# Altium PCB ESP32C6_Xbee.PcbDoc
Units mm, origin at the board's own origin, x right, y up, seen from the top; angles counter-clockwise.
Board outline 96 x 49 mm, 2 copper layers (Top Layer, Bottom Layer), stack 1.571 mm thick; 24 components, 21 nets, 105 pads, 5 vias.
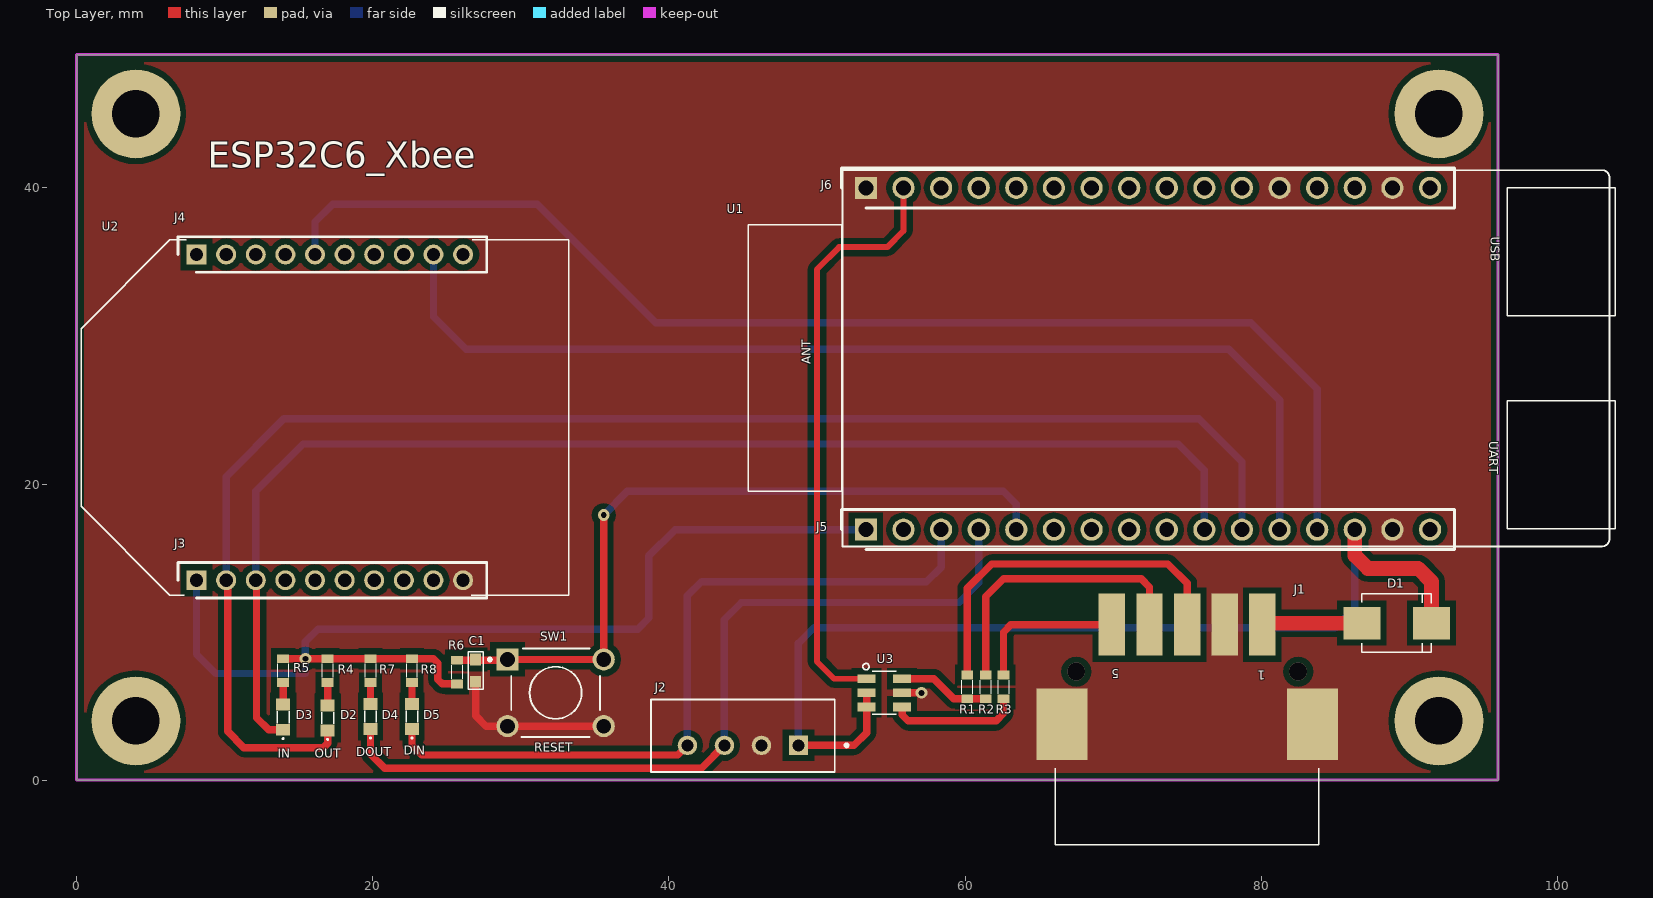
[diagram p0: Top Layer view]
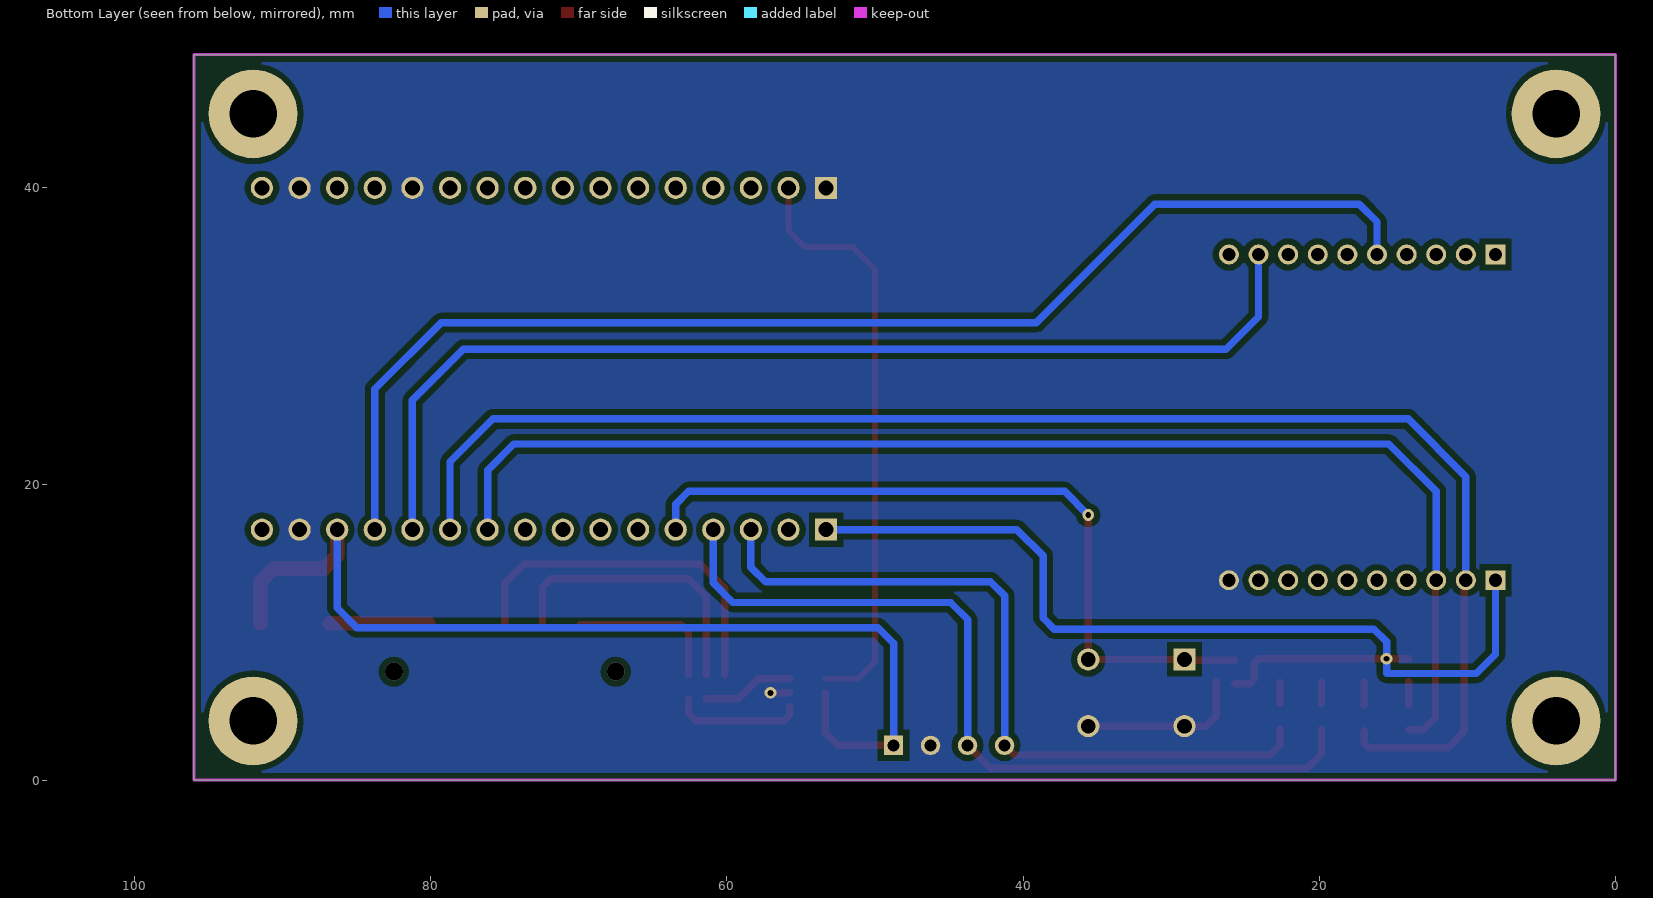
[diagram p1: Bottom Layer view, seen from below]
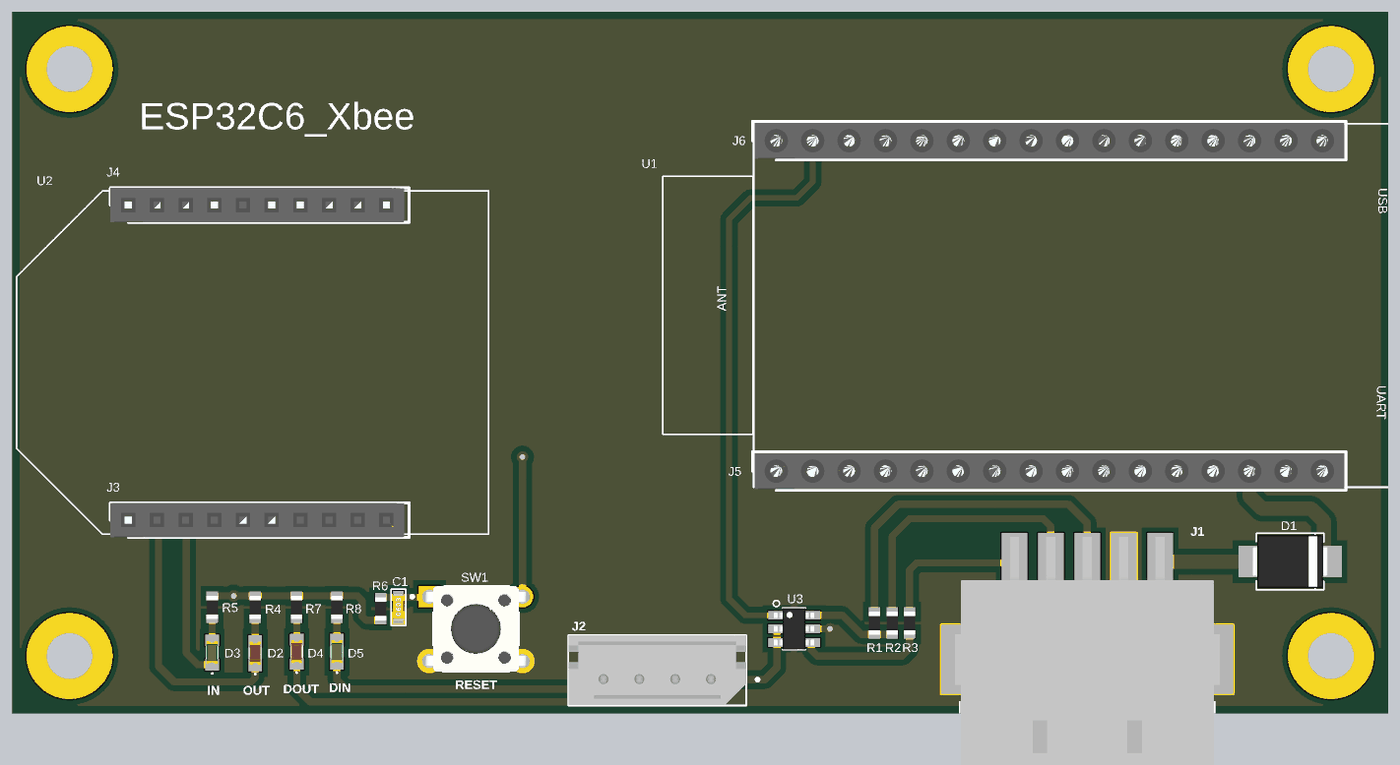
[diagram p2: 3D render of the assembled board from above, using the file's embedded part models]

## Layer stack, top to bottom
Top Solder: solder mask 0.0102, Solder Resist, Dk 3.5
Top Layer: signal copper 0.0356
Dielectric 1: dielectric 1.5, FR-4, Dk 4.8
Bottom Layer: signal copper 0.0356
Bottom Solder: solder mask 0.0102, Solder Resist, Dk 3.5

## Board outline
0,0 0,49 96,49 96,0

## Design rules (kind name [scope] priority, off if disabled: settings)
Clearance Clearance_poly [InPoly] p1: gap=0.4 ignorepadtopadclearanceinfootprint=FALSE
Clearance [All] p2: gap=0.3 ignorepadtopadclearanceinfootprint=FALSE except(0.1: Track-SMDPad)
HoleSize [All] p1: absolutevalues=TRUE maxlimit=5 minlimit=0.025 maxpercent=80.000 minpercent=20.000
MinimumSolderMaskSliver [All] p1: minsoldermaskwidth=0
PolygonConnect PolygonConnect_via [IsVia] p1: connectstyle=Direct reliefconductorwidth=0.254 reliefentries=4 polygonreliefangle="90 Angle" airgapwidth=0.254
PolygonConnect [All] p2: connectstyle=Direct reliefconductorwidth=0.254 reliefentries=4 polygonreliefangle="90 Angle" airgapwidth=0.254
RoomDefinition ESP32C6_Xbee [InComponentClass('ESP32C6_Xbee')] p1: confinementstyle=ConfineOut formatcopy=TRUE lockcomponents=FALSE outline -40.913,-107.011 -19.113,-107.011 -19.113,-96.811 -40.913,-96.811
RoutingVias [All] p1: holewidth=0.3 width=0.6 viastyle="Through Hole" minholewidth=0.3 minwidth=0.6 maxholewidth=0.711 maxwidth=1.27
SilkToSilkClearance [All] p1: silktosilkclearance=0
SilkToSolderMaskClearance [IsPad] p1: minsilkscreentomaskgap=0 clearancetoexposedcopper=TRUE
SolderMaskExpansion [All] p1: expansion=0.102 istentingtop=FALSE
Width [All] p1: maxlimit=2 minlimit=0.254 preferedwidth=0.3 bottomlayer_maxwidth=1 minimp=50.000000 maximp=50.000000 favimp=50.000000
26 further rules are at their usual default settings.

## Components (designator, comment, footprint, x,y, rotation, side; value= is the part's Value field where it differs from the comment)
C1 "100nF" C0603 26.95,7.4 r90 top
D1 "SS24" DO-214AA 86.8,10.6 r0 top
D2 "LSM0603412V" LSM0603412V 16.95,4.2 r90 top
D3 "LSM0603453V" LEDC1608X55N 13.95,4.25 r90 top
D4 "LSM0603412V" LSM0603412V 19.85,4.3 r90 top
D5 "LSM0603453V" LEDC1608X55N 22.65,4.3 r90 top
J1 "5-147323-4" 5-147323-4 75,10.5 r180 top
J2 "22-03-5045" MOLEX_22-03-5045 45,3 r180 top value="4P con"
J3 "M22-7131042" M22-7131042 8.1,13.5 r0 top
J4 "M22-7131042" M22-7131042 8.1,35.5 r0 top
J5 "61301611821" 61301611821 53.304,16.92 r0 top value="1Row 16Pin"
J6 "61301611821" 61301611821 53.304,40 r0 top value="1Row 16Pin"
R1 "100" R0603 60.15,6.3 r270 top
R2 "10" R0603 61.4,6.3 r270 top
R3 "10" R0603 62.6,6.3 r270 top
R4 "1K" R0603 16.95,7.4 r90 top
R5 "1K" R0603 13.95,7.4 r90 top
R6 "10K" R0603 25.7,7.3 r270 top
R7 "1K" R0603 19.85,7.4 r90 top
R8 "1K" R0603 22.65,7.4 r90 top
SW1 "1825910-6" SW_1825910-6-4 32.35,5.9 r0 top
U1 "ESP32C6-Devkit" ESP32-C6-DEVKIT 73.3,28.6 r90 top value="No FIT"
U2 "XBee-PRO S3B" XBEE(MMS-110-02-L-SV-K-TR) 17,24.5 r90 top value="No FIT"
U3 "ISL3295EIHZ-T" SOT23-6 54.55,5.9 r0 top

## Footprints (in the part's own frame and the unit in brackets; to place one, negate y for a bottom-side part, rotate by r counter-clockwise, add the part's x,y. Pads: shape width x height; smd on the part's side, far side on the other; paste and mask are expansions set on the pad)
5-147323-4 [mm]
  rect 1.78x4.19 smd: 1(-5.08,0) 2(-2.54,0) 3(0,0) 4(2.54,0) 5(5.08,0)
  rect 3.45x4.83 smd: 6(-8.46,6.73) 7(8.46,6.73)
  silkscreen extent -8.89,9.68 8.89,14.86, body extent -9.23,-1.84 9.23,14.8, height 7.36
61301611821 [mm]
  rect 1.5x1.5 hole 1: 1(0,0)
  round 1.5 hole 1: 2(2.54,0) 3(5.08,0) 4(7.62,0) 5(10.16,0) 6(12.7,0) 7(15.24,0) 8(17.78,0) 9(20.32,0) 10(22.86,0) 11(25.4,0) 12(27.94,0) 13(30.48,0) 14(33.02,0) 15(35.56,0) 16(38.1,0)
  silkscreen extent -1.65,-1.35 39.75,1.35, body extent -1.52,-1.25 39.62,1.25, height 8.65
C0603 [mm] "CAPACITOR SMD 0603"
  rect 0.8x0.75 smd: 1(-0.75,0) 2(0.75,0)
  silkscreen extent -1.27,-0.51 1.27,0.51, body extent -1,-0.39 1,0.39, height 0.79
DO-214AA [mm]
  rect 2.5x2.2 smd mask+0: 1(0,0) 2(4.7,0)
  silkscreen extent 0,-1.97 4.7,1.97, body extent -0.3,-1.85 5,1.85, height 2.2
ESP32-C6-DEVKIT [mm]
  silkscreen extent -12.81,-30.62 12.59,27.92
LEDC1608X55N [mm]
  rect 0.8x0.95 smd: 1(-0.85,0) 2(0.85,0)
  silkscreen extent -1.5,-0.4 0.4,0.4, body extent -0.8,-0.4 0.8,0.4, height 0.55
LSM0603412V [mm]
  rect 0.8x0.95 smd: 1(-0.85,0) 2(0.85,0)
  silkscreen extent -1.5,-0.4 0.4,0.4, body extent -0.8,-0.4 0.8,0.4, height 0.55
M22-7131042 [mm]
  rect 1.35x1.35 hole 0.9: 1(0,0)
  round 1.35 hole 0.9: 2(2,0) 3(4,0) 4(6,0) 5(8,0) 6(10,0) 7(12,0) 8(14,0) 9(16,0) 10(18,0)
  silkscreen extent -1.25,-1.2 19.6,1.2, body extent -1.25,-1.2 19.25,1.2, height 4.4
MOLEX_22-03-5045 [mm]
  rect 1.308x1.308 hole 0.8: 1(-3.75,0.65)
  round 1.308 hole 0.8: 2(-1.25,0.65) 3(1.25,0.65) 4(3.75,0.65)
  silkscreen extent -7.1,-2.45 6.2,2.45, body extent -6.2,-2.47 6.2,2.43, height 6.05
R0603 [mm]
  rect 0.6x0.8 smd mask+0.05: 1(-0.8,0) 2(0.8,0)
  silkscreen extent -0.46,-0.37 0.46,0.37, body extent -0.8,-0.4 0.8,0.4, height 0.45
SOT23-6 [mm]
  rect 1.2x0.6 smd: 1(-1.2,0.95) 2(-1.2,0) 3(-1.2,-0.95) 4(1.2,-0.95) 5(1.2,0) 6(1.2,0.95)
  silkscreen extent -1.46,-1.45 0.8,1.99, body extent -1.4,-1.45 1.4,1.45, height 1.45
SW_1825910-6-4 [mm]
  rect 1.498x1.498 hole 0.99: 1(-3.25,2.25)
  round 1.498 hole 0.99: 1(3.25,2.25) 2(-3.25,-2.25) 2(3.25,-2.25)
  silkscreen extent -4.54,-3 3,3, body extent -3.9,-3 3.9,3, height 5.01
XBEE(MMS-110-02-L-SV-K-TR) [mm]
  silkscreen extent -12,-16.24 12,16.7

## Part data
C1: library part "100nF ± 10% 50V", "0.1 µF ±10% 50V Ceramic Capacitor X7R 0603 (1608 Metric)", Manufacturer=Yageo, Manufacturer Part Number=CS0603KRX7R9BB104, Supplier Part Number=311-3568-2-ND, Price=0.14, Supplier=Digi-key
D1: "Schottky Diodes & Rectifiers 2A, 40V, Schottky Rectifier", Manufacturer="Taiwan Semiconductor", Supplier Part Number=SS24FSTR-ND, Manufacturer Part Number=SS24, Price=0.37, Supplier=Digi-key
D2 D4: "Red 635nm LED Indication - Discrete 2V 0603 (1608 Metric)", Manufacturer="Visual Communications Company", Supplier Part Number=LSM0603412VTR-ND, Manufacturer Part Number=LSM0603412V, Price=0.4, Supplier=Digi-key
D3 D5: "Standard LEDs - SMD SMD 0603 3V 1000mcd GREEN", Manufacturer="Visual Communications Company", Supplier Part Number=LSM0603453VTR-ND, Manufacturer Part Number=LSM0603453V, Price=0.4, Supplier=Digi-key
J1: "Connector Header Surface Mount, Right Angle 5 position 0.100\" (2.54mm)", Manufacturer="TE Connectivity", Supplier Part Number=A120814TR-ND, Manufacturer Part Number=5-147323-4, Price=6.3, Supplier=Digi-key
J2: "Headers & Wire Housings 2.5 VERT HDR SPOX 4P shrouded", Manufacturer=Molex, Supplier Part Number=538-22-03-5045, Manufacturer Part Number=22-03-5045, Price=22-03-5045, Supplier=Mouser
J3 J4: "2.00mm (0.079\") Pitch SIL Vertical 2.6mm Throughboard Socket Assembly, selective gold + tin, 10 contacts", Manufacturer=Harwin, Supplier Part Number=952-1354-5-ND, Geometry.Height=4.4mm, Manufacturer Part Number=M22-7131042, Price=1.9, Supplier=Digi-key
J5 J6: "16 Position Header Connector 0.100\" (2.54mm) Through Hole Gold", Manufacturer="Wurth Elektronik", Supplier Part Number=61301611821-ND, Geometry.Height=8.65mm, Manufacturer Part Number=61301611821, Price=0.68, Supplier=Digi-key
R1: library part "100 Ohms ±1% 0.1W", "100 Ohms ±1% 0.1W, 1/10W Chip Resistor 0603 (1608 Metric) Moisture Resistant Thick Film", Manufacturer=Yageo, Manufacturer Part Number=RC0603FR-07100RL, Supplier Part Number=311-100HRTR-ND, Price=0.1, Supplier=Digi-key
R2 R3: library part "10 Ohms ±1% 0.1W", "10 Ohms ±1% 0.1W, 1/10W Chip Resistor 0603 (1608 Metric) Moisture Resistant Thick Film", Manufacturer=Yageo, Manufacturer Part Number=RC0603FR-0710RL, Supplier Part Number=311-10.0HRTR-ND, Price=0.1, Supplier=Diogi-key
R4 R5 R7 R8: library part "1K Ohms ±1% 0.1W", "1 kOhms ±1% 0.1W, 1/10W Chip Resistor 0603 (1608 Metric) Moisture Resistant Thick Film", Manufacturer=Yageo, Manufacturer Part Number=RC0603FR-071KL, Supplier Part Number=311-1.00KHRTR-ND, Price=0.1, Supplier=Digi-key
R6: library part "10K Ohms ±1% 0.1W", "10 kOhms ±1% 0.1W, 1/10W Chip Resistor 0603 (1608 Metric) Moisture Resistant Thick Film", Manufacturer=Yageo, Manufacturer Part Number=RC0603FR-0710KL, Supplier Part Number=311-10.0KHRTR-ND, Price=0.1, Supplier=Digi-key
SW1: "Tactile Switch SPST-NO Top Actuated Through Hole", Manufacturer="TE Connectivity", Supplier Part Number=450-1650-ND, Manufacturer Part Number=1825910-6, Price=0.13, Supplier=Digi-key
U1: "ESP32-C6-MINI-1 Transceiver; Bluetooth® 5 2.4GHz Evaluation Board", Manufacturer="Espressif Systems", Manufacturer Part Number=ESP32-C6-DevKitM-1-N4, Supplier Part Number=1965-ESP32-C6-DEVKITM-1-N4-ND, Price=8, Supplier=Digi-key
U2: "General ISM < 1GHz Transceiver Module 920MHz Antenna Not Included, RP-SMA Through Hole", Manufacturer=DIGI, Manufacturer Part Number=XBP9B-XCST-022, Supplier Part Number=602-1353-ND, Price=58.5, Supplier=Digi-key
U3: "1/0 Driver RS422, RS485 6-SOT", Manufacturer="Renesas Electronics America Inc", Supplier Part Number=ISL3295EIHZ-TTR-ND, Manufacturer Part Number=ISL3295EIHZ-T, Price=1.67, Supplier=Digi-key

## Free pads (board coordinates)
  round 6 hole 3.2: 0(4,4) 0(4,45) 0(92,4) 0(92,45)

## Via types
v1: diameter 0.8, hole 0.4, Top Layer to Bottom Layer, tented both sides, 3 vias
v2: diameter 1.2, hole 1.2, Top Layer to Bottom Layer, 2 vias

## Nets (pads, with @x,y where several pads share a name; then routed paths per layer and width w, separated by ;. In a path a pad name is that pad's centre, name@x,y a point inside that pad or via, vN(x,y) a via of type N, cw(c..) or ccw(c..) an arc to the next point about the centre after c; other vN are vias at no path point)
BUTTON: C1.2 J5.5 R6.1 SW1.1 | length 50.3
  Top Layer w0.5: R6.1 29.05,8.1 29.1,8.15 35.6,8.15 v1(35.6,17.9)
  Bottom Layer w0.5: v1(35.6,17.9) 37.2,19.5 62.6,19.5 63.464,18.636 J5.5
DIN: D5.1 J2.4 J5.3 | length 50.8
  Top Layer w0.5: D5.1 22.65,2.35 23.3,1.7 40.6,1.7 J2.4
  Bottom Layer w0.5: J2.4 41.25,12.45 42.2,13.4 57.4,13.4 58.384,14.384 J5.3
DOUT: D4.1 J2.3 J5.4 | length 56.9
  Top Layer w0.5: D4.1 19.85,1.75 20.8,0.8 42.2,0.8 J2.3
  Bottom Layer w0.5: J2.3 43.75,10.85 44.9,12 59.6,12 60.924,13.324 J5.4
GND: C1.1 J1.2 J1.6 J1.7 J2.2 J3.10 J5.15 J6.1 J6.12 J6.15 SW1.2 U3.5 | length 12.5
  Top Layer w0.5: C1.1 26.95,4.35 27.65,3.65 29.1,3.65 SW1.2@35.6,3.65 ; U3.5@55.75,5.9 v1(57.05,5.9)
NetD1_1: D1.1 J1.1 | length 6.8
  Top Layer w0.75: J1.1 J1.1@80.18,10.6
  Top Layer w1: J1.1@80.18,10.6 D1.1
NetD2_2: D2.2 R4.1 | length 1.5
  Top Layer w0.5: D2.2 R4.1
NetD3_2: D3.2 R5.1 | length 1.5
  Top Layer w0.5: D3.2 R5.1 R5.1@13.95,6.65
NetD4_2: D4.2 R7.1 | length 1.5
  Top Layer w0.5: D4.2 R7.1
NetD5_2: D5.2 R8.1 | length 1.5
  Top Layer w0.5: D5.2 R8.1
NetJ1_4: J1.4 R2.1 | length 19.6
  Top Layer w0.5: R2.1 61.4,12.4 62.6,13.6 71.9,13.6 72.46,13.04 J1.4
NetJ1_5: J1.5 R3.1 | length 10.4
  Top Layer w0.5: R3.1 62.6,10 63.1,10.5 J1.5
NetR1_2: R1.2 R2.2 U3.6 | length 6.2
  Top Layer w0.5: U3.6 57.9,6.85 59.25,5.5 R1.2 R2.2
NetR3_2: R3.2 U3.4 | length 8.8
  Top Layer w0.5: U3.4 55.75,4.4 56.15,4 62.1,4 62.6,4.5 R3.2
RADIO_SENSE: J1.3 R1.1 | length 24.7
  Top Layer w0.5: R1.1 60.15,12.95 61.8,14.6 73.7,14.6 75,13.3 J1.3
RS232_TXD: J6.2 U3.1 | length 40.2
  Top Layer w0.4: U3.1 51.15,6.85 50,8 50,34.5 51.5,36 54.75,36 55.844,37.094 J6.2
U1CTS: J4.9 J5.12 | length 72.4
  Bottom Layer w0.5: J4.9 24.1,31.3 26.3,29.1 77.8,29.1 81.244,25.656 J5.12
U1RTS: J4.5 J5.13 | length 85
  Bottom Layer w0.5: J4.5 16.1,37.7 17.3,38.9 31.1,38.9 39.1,30.9 79.3,30.9 83.784,26.416 J5.13
U1RX: D2.1 J3.2 J5.11 | length 101.4
  Top Layer w0.5: J3.2 10.206,13.394 10.206,3.294 11.3,2.2 16.65,2.2 16.95,2.5 D2.1
  Bottom Layer w0.5: J3.2 10.1,20.5 14,24.4 75.8,24.4 78.704,21.496 J5.11
U1TX: D3.1 J3.3 J5.10 | length 87.6
  Top Layer w0.5: J3.3 12.15,13.45 12.15,4.22 12.97,3.4 D3.1
  Bottom Layer w0.5: J3.3 12.1,19.5 15.3,22.7 74.4,22.7 76.164,20.936 J5.10
VCC: J3.1 J5.1 R4.2 R5.2 R6.2 R7.2 R8.2 | length 71.6
  Top Layer w0.5: R5.2 v1(15.45,8.2) R4.2 R7.2 R8.2 24.1,8.2 24.4,7.9 24.4,6.8 24.7,6.5 R6.2
  Bottom Layer w0.5: J3.1 8.1,8.5 9.4,7.2 15.45,7.2 v1(15.45,8.2) 15.45,9.35 16.3,10.2 37.9,10.2 38.65,10.95 38.65,15.15 40.42,16.92 J5.1
VCC5V: D1.2 J2.1 J5.14 U3.2 U3.3 | length 68.9
  Top Layer w0.5: J2.1 52.5,2.35 53.35,3.2 U3.3 U3.2
  Top Layer w1: J5.14 86.324,15.176 87.2,14.3 90.6,14.3 91.5,13.4 D1.2
  Bottom Layer w0.5: J2.1 48.75,9.25 49.8,10.3 85,10.3 86.324,11.624 J5.14
pads on no net: J3.4 J3.5 J3.6 J3.7 J3.8 J3.9 J4.1 J4.2 J4.3 J4.4 J4.6 J4.7 J4.8 J4.10 J5.2 J5.6 J5.7 J5.8 J5.9 J5.16 J6.3 J6.4 J6.5 J6.6 J6.7 J6.8 J6.9 J6.10 J6.11 J6.13 J6.14 J6.16
copper on no net:
  other v2: 67.505,7.33 82.495,7.33

## Polygon pours and split planes (outlines as drawn)
GND on Bottom Layer "GND_L02_P000" (solid, remove dead copper, pour order 0): 0,49 0,0 96,0 96,49
GND on Top Layer "GND_L01_P003" (solid, remove dead copper, pour order 3): 0,49 0,0 96,0 96,49

## Keep-outs
Keep-Out Layer:
  the board outline again, w0.2

## Silkscreen, mask and mechanical layers (free items; w line width, h text height)
Top Overlay:
  text "ESP32C6_Xbee" at 8.85,40.8 h3
  text "RESET" at 30.9,1.7 h1
  text "DIN" at 22.1,1.5 h1
  text "DOUT" at 18.9,1.4 h1
  text "IN" at 13.6,1.3 h1
  text "OUT" at 16.1,1.3 h1
Mechanical 1:
  drawing of 3702 lines, arcs and shapes, not listed

## Text inside footprints (layer, text, board x,y; h text height)
J1: Top Overlay "5" at 70.43,7.49 h0.6 r180; Top Overlay "1" at 80.27,7.39 h0.6 r180
U1: Top Overlay "UART" at 95.211,22.9 h1 r270; Top Overlay "USB" at 95.311,36.7 h1 r270; Top Overlay "ANT" at 49.8,28.1 h1 r90